# EAGLE board Relay Driver_V1.1 (EAGLE 7.1.0)
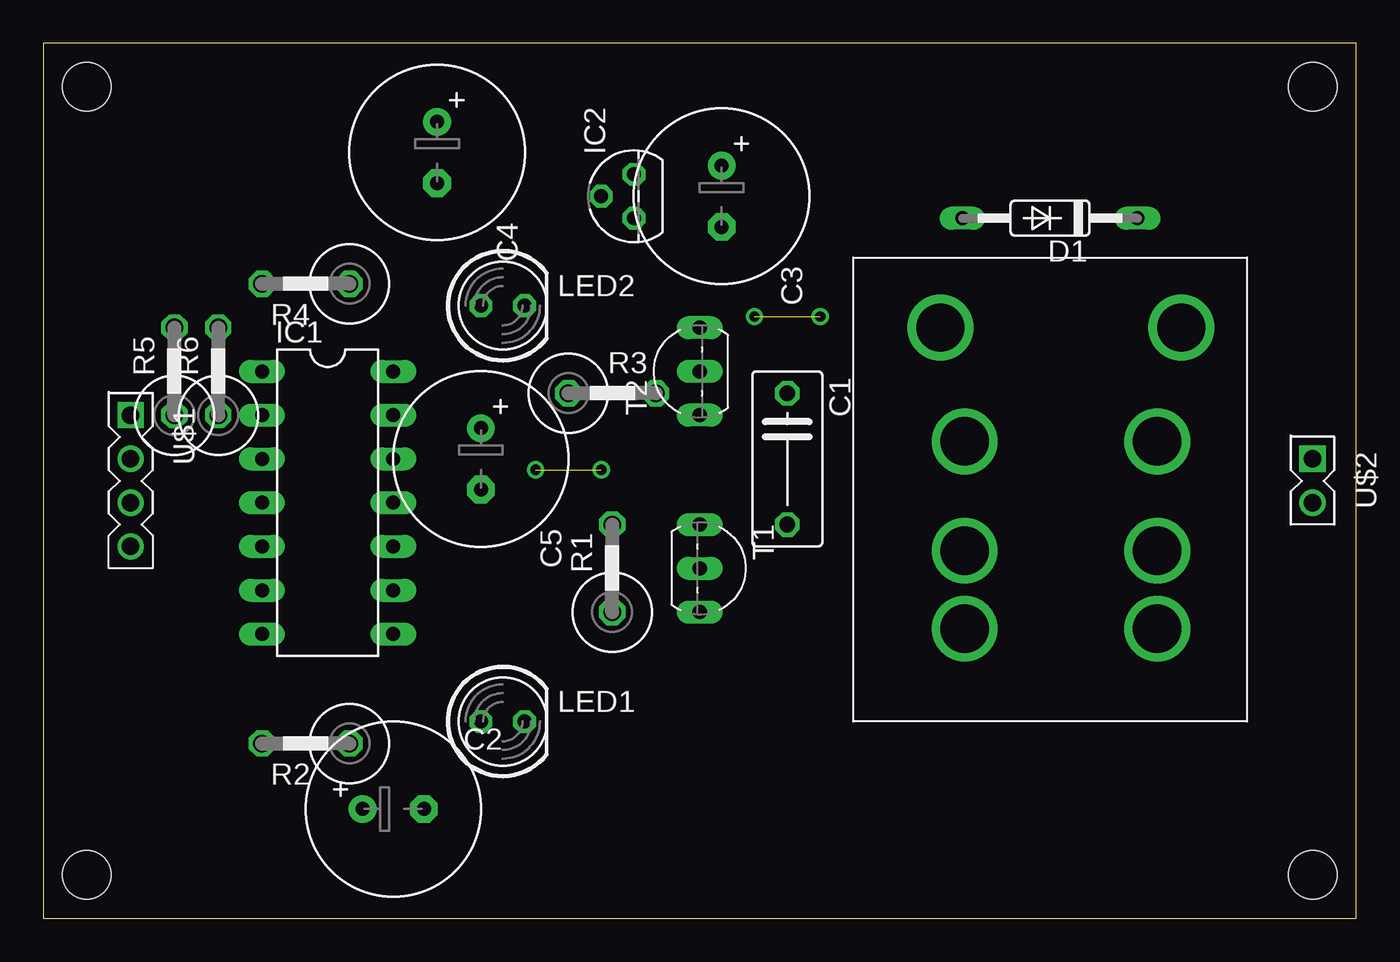
[diagram p0: board, top side]
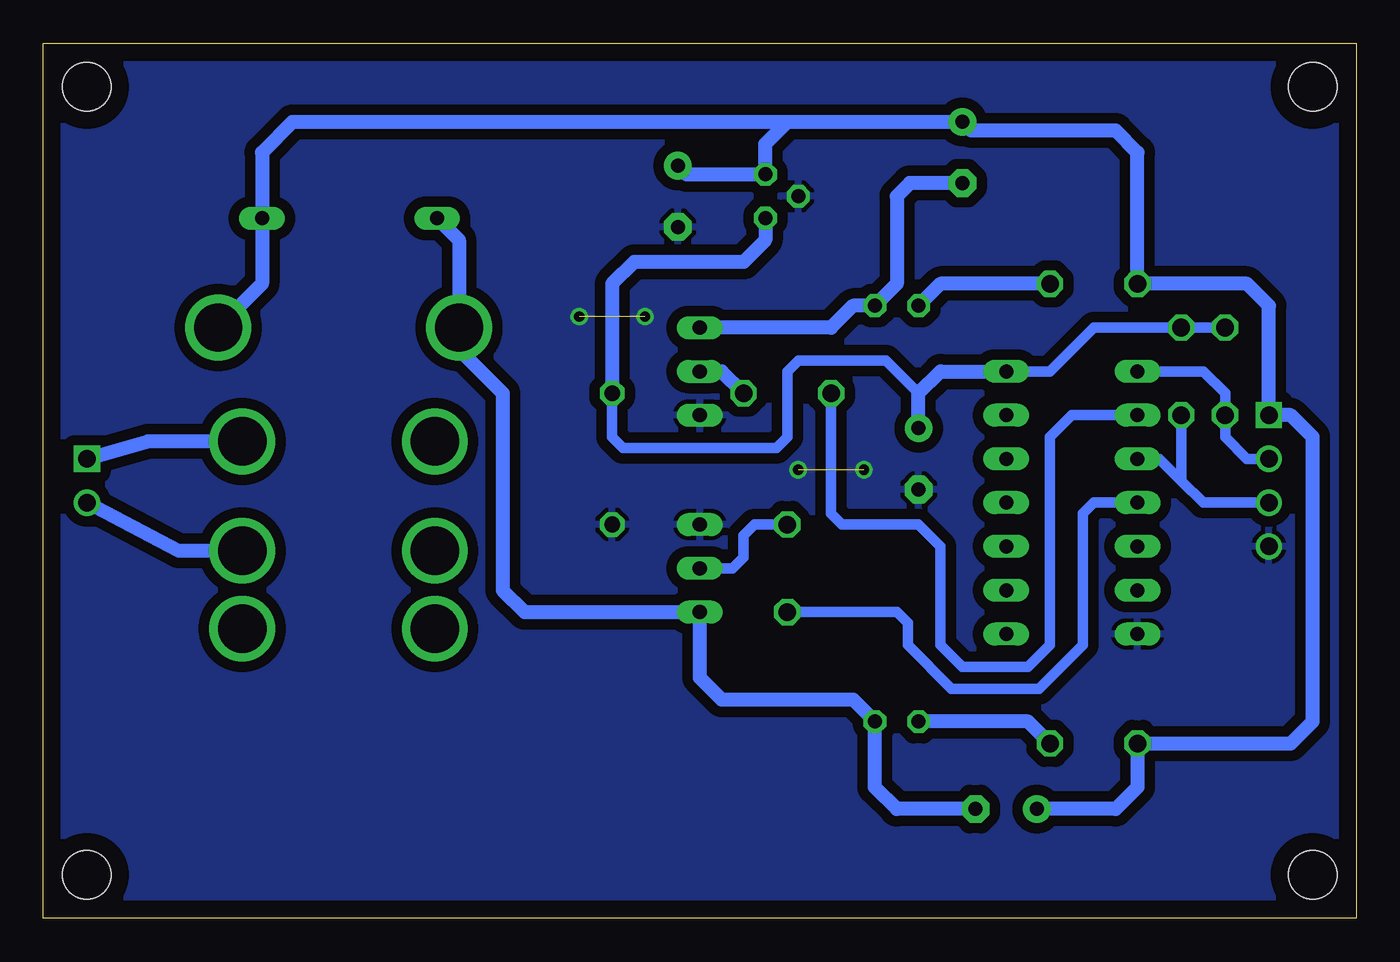
[diagram p1: board, bottom side, seen from below]

Size 76.2 x 50.8 mm. Coordinates in mm from the lower left corner, seen from the top.
Outline: 0,0 76.2,0 76.2,50.8 0,50.79 0,0
Copper layers (1*16): Top 0.035mm / dielectric 1.5mm / Bottom 0.035mm
Design rules "default": minimum track width 10mil, minimum drill 24mil, track to track 8mil, track to pad 8mil, pad to pad 8mil, via to via 8mil, smd to smd 8mil, copper to edge 40mil, drill to drill 8mil, minimum pad ring 10mil, minimum via ring 8mil, stop-mask expansion 4mil, vias tented up to drill 0mil, thermal gap 10mil
Holes 2.8 mm at 2.54,48.26 2.54,2.54 73.66,48.26 73.66,2.54

## Footprints (pad centres in the part's own frame; a part is rotated, then mirrored left to right if it is on the bottom)
C075-042X103 = drill 0.914 octagon: 1 -3.81,0; 2 3.81,0
E3,5-10 = drill 0.813 pad 1.6: + -1.778,0 | drill 0.813 pad 1.6 octagon: - 1.778,0
DO35-10 = drill 0.813 long: A 5.08,0; C -5.08,0
DIL14 = drill 0.813 long: 1 -7.62,-3.81; 2 -5.08,-3.81; 3 -2.54,-3.81; 4 0,-3.81; 5 2.54,-3.81; 6 5.08,-3.81; 7 7.62,-3.81; 8 7.62,3.81; 9 5.08,3.81; 10 2.54,3.81; 11 0,3.81; 12 -2.54,3.81; 13 -5.08,3.81; 14 -7.62,3.81
TO92 = drill 0.813 octagon: 1 -1.27,0; 2 0,1.905; 3 1.27,0
LED5MM = drill 0.813 octagon: A -1.27,0; K 1.27,0
P0613V = drill 1.016 octagon: 1 -2.54,0; 2 2.54,0
FRL-264 = drill 2.8: COIL+ 0,13.97; COIL- 0,0; COM1 6.604,12.573; COM2 6.604,1.397; NC1 17.475,12.573; NC2 17.475,1.397; NO1 12.954,12.573; NO2 12.954,1.397
TO92-EBC = drill 0.813 long: B 0,-1.27; C 2.54,-1.27; E -2.54,-1.27
1X4_100MIL = drill 1.016 square: 1 -2.54,-1.27 | drill 1.016: 2 0,-1.27; 3 2.54,-1.27; 4 5.08,-1.27
1X2_100MIL = drill 1.016 square: 1 -2.54,0 | drill 1.016: 2 0,0

## Placement (x,y rotation side)
C1  10nF  [C075-042X103]  43.18,26.67 270 top
C2  4.7uF  [E3,5-10]  20.32,6.35 0 top
C3  .33uF  [E3,5-10]  39.37,41.91 270 top
C4  4.7uF  [E3,5-10]  22.86,44.45 270 top
C5  10uF  [E3,5-10]  25.4,26.67 270 top
D1  1N4148DO35-10  [DO35-10]  58.42,40.64 180 top
IC1  74AC04N  [DIL14]  16.51,24.13 270 top
IC2  7805L  [TO92]  34.29,41.91 90 top
LED1  [LED5MM]  26.67,11.43 0 top
LED2  [LED5MM]  26.67,35.56 0 top
R1  1k  [P0613V]  33.02,20.32 90 top
R2  1k  [P0613V]  15.24,10.16 180 top
R3  1k  [P0613V]  33.02,30.48 0 top
R4  1k  [P0613V]  15.24,36.83 180 top
R5  1k  [P0613V]  7.62,31.75 90 top
R6  1k  [P0613V]  10.16,31.75 90 top
RL1  FRL-264  [FRL-264]  52.07,34.29 270 top
T1  [TO92-EBC]  39.37,20.32 270 top
T2  [TO92-EBC]  36.83,31.75 90 top
U$1  1X4HEADER_100MIL  [1X4_100MIL]  6.35,26.67 270 top
U$2  1X2HEADER_100MIL  [1X2_100MIL]  73.66,24.13 270 top

## Library data of the parts
C1-C5 R1-R6 = rcl
D1 = diode
IC1 = 74xx-eu
IC2 = linear
LED1 LED2 = led
RL1 = relay
T1 T2 = transistor
U$1 U$2 = Headers

## Nets
+5V: C1.1 C5.+ IC1.14 IC2.1 R5.2 R6.2
+8V: C2.+ C3.+ C4.+ D1.C IC2.3 R2.2 R4.2 RL1.COIL+ U$1.1
G0: IC1.2 R3.1
G1: IC1.4 R1.1
GND: C1.2 C3.- C5.- IC1.7 IC2.2 T1.E T2.E U$1.4
N$1: R1.2 T1.B
N$2: RL1.NO1 U$2.2
N$3: R3.2 T2.B
N$4: C2.- D1.A LED1.K RL1.COIL- T1.C
N$5: RL1.COM1 U$2.1
N$6: IC1.1 R5.1 U$1.2
N$7: C4.- LED2.K T2.C
N$8: IC1.3 R6.1 U$1.3
N$9: LED1.A R2.1
N$10: LED2.A R4.1

## Tracks (layer width: path | path; a pad name or v marks a point on that pad's centre or on a via)
+5V
  Bottom 0.61: R5.2 R6.2 15.24,34.29 17.78,31.75 IC1.14 | 25.4,30.48 27.3,32.38 32.38,32.38 33.02,31.75 33.02,27.94 33.66,27.3 42.55,27.3 43.18,27.94 C1.1
  Bottom 0.813: IC2.1 34.29,39.37 35.56,38.1 41.91,38.1 43.18,36.83 C1.1 | C5.+ 25.4,30.48 24.13,31.75 IC1.14
+8V
  Bottom 0.813: C2.+ 13.97,6.35 12.7,7.62 R2.2 3.81,10.16 2.54,11.43 2.54,27.94 3.81,29.21 U$1.1 5.08,35.56 6.35,36.83 R4.2 12.7,44.45 13.97,45.72 22.35,45.72 C4.+ 33.02,46.23 | 33.02,46.23 61.72,46.23 63.5,44.45 D1.C 63.5,36.83 RL1.COIL+ | C3.+ 38.86,43.18 IC2.3 34.29,44.96 33.02,46.23
G0
  Bottom 0.61: IC1.2 16.51,29.21 17.78,27.94 17.78,15.88 19.05,14.61 22.86,14.61 24.13,15.88 24.13,21.59 25.4,22.86 29.84,22.86 30.48,23.5 R3.1
G1
  Bottom 0.61: IC1.4 15.24,24.13 15.88,23.5 15.88,15.88 18.41,13.34 23.5,13.34 26.04,15.88 26.04,17.14 26.67,17.78 R1.1
GND  (via drill 0.6)  (2 unrouted)
  other vias: 28.57,26.04 32.38,26.04 41.27,34.92 45.09,34.92
  pour Bottom (isolate 0.61): 0,0 0,50.8 76.2,50.8 76.2,0
N$1
  Bottom 0.61: R1.2 34.92,22.86 35.56,22.23 35.56,20.95 36.2,20.32 T1.B
N$2
  Bottom 0.813: RL1.NO1 68.33,21.34 U$2.2
N$3
  Bottom 0.813: T2.B 36.83,31.75 R3.2
N$4
  Bottom 0.813: C2.- 26.67,6.35 27.94,7.62 LED1.K 29.21,12.7 36.83,12.7 38.1,13.97 T1.C 48.26,17.78 49.53,19.05 49.53,30.48 52.07,33.02 RL1.COIL- 52.07,39.37 D1.A
N$5
  Bottom 0.813: RL1.COM1 70.1,27.69 U$2.1
N$6
  Bottom 0.61: U$1.2 6.35,26.67 7.62,27.94 R5.1 7.62,30.48 8.89,31.75 IC1.1
N$7
  Bottom 0.813: T2.C 30.48,34.29 29.21,35.56 LED2.K 26.67,36.83 26.67,41.91 25.91,42.67 C4.-
N$8
  Bottom 0.61: U$1.3 8.89,24.13 10.16,25.4 | 10.16,25.4 R6.1 | IC1.3 11.43,26.67 10.16,25.4
N$9
  Bottom 0.813: R2.1 19.05,11.43 LED1.A
N$10
  Bottom 0.813: R4.1 24.13,36.83 LED2.A

## Text on the board
Document: Add Jumper | Add Jumper